# EAGLE board Transistor_Valve_Breakout_Circuit_Manual (EAGLE 9.3.0)
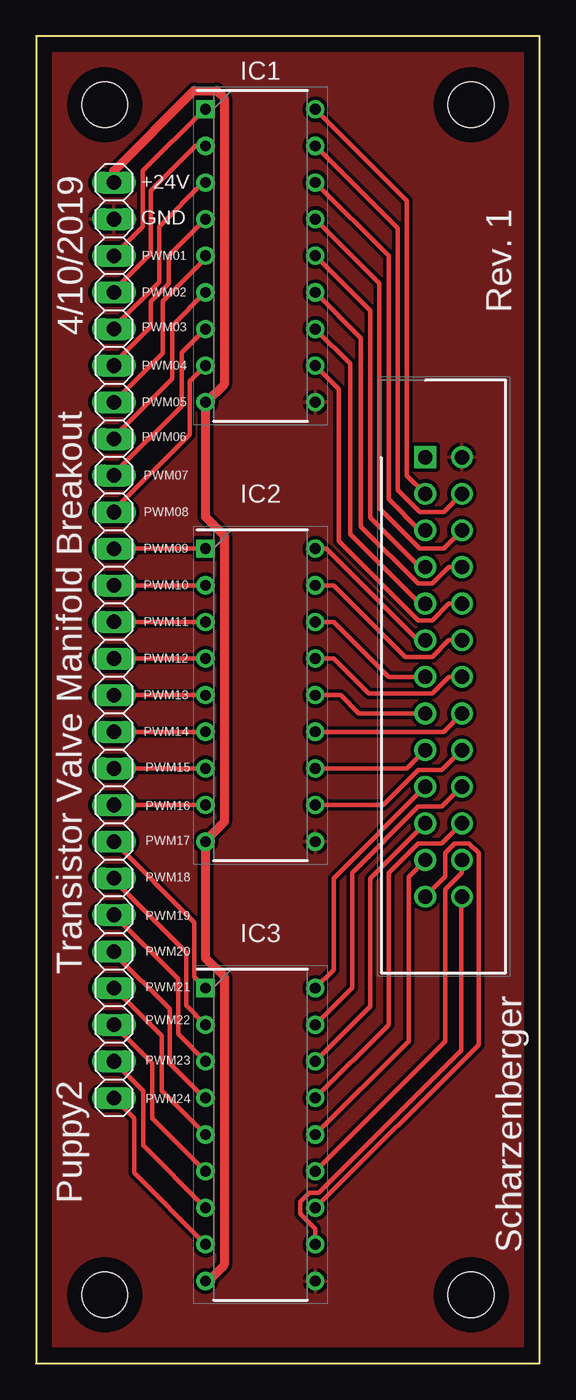
[diagram p0: board, top side]
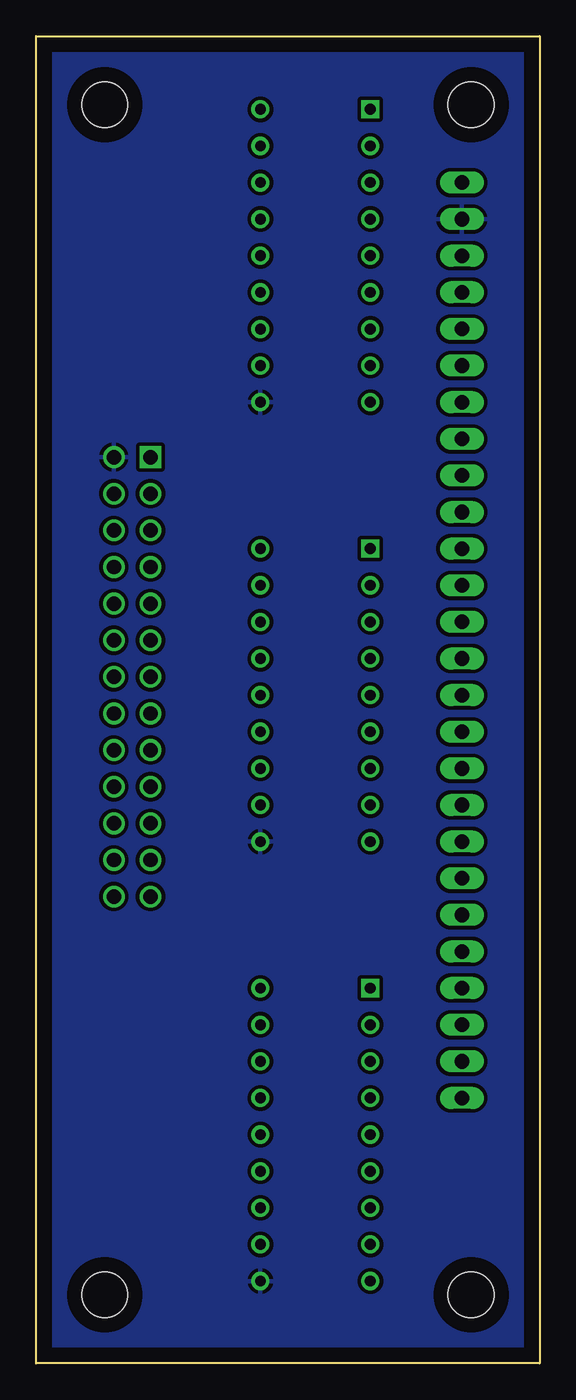
[diagram p1: board, bottom side, seen from below]

Size 34.92 x 92.08 mm. Coordinates in mm from the lower left corner, seen from the top.
Outline: 0,0 34.92,0 34.92,92.08 0,92.08 0,0
Copper layers (1*16): Top 0.035mm / dielectric 1.5mm / Bottom 0.035mm
Design rules "default": minimum track width 6mil, minimum drill 0.35mm, track to track 6mil, track to pad 6mil, pad to pad 6mil, via to via 6mil, smd to smd 6mil, copper to edge 40mil, drill to drill 6mil, minimum pad ring 10mil, minimum via ring 8mil, stop-mask expansion 4mil, vias tented up to drill 0mil, thermal gap 10mil
Net classes: 0 default: width 0.305 mm, drill 0.508 mm, clearance 0.254 mm
Holes 3.17 mm at 4.76,87.31 30.16,87.31 4.76,4.76 30.16,4.76

## Footprints (pad centres in the part's own frame; a part is rotated, then mirrored left to right if it is on the bottom)
DIP762W55P254L2286H480Q18N = drill 0.75 pad 1.15 square: 1 -3.81,10.16 | drill 0.75 pad 1.15: 2 -3.81,7.62; 3 -3.81,5.08; 4 -3.81,2.54; 5 -3.81,0; 6 -3.81,-2.54; 7 -3.81,-5.08; 8 -3.81,-7.62; 9 -3.81,-10.16; 10 3.81,-10.16; 11 3.81,-7.62; 12 3.81,-5.08; 13 3.81,-2.54; 14 3.81,0; 15 3.81,2.54; 16 3.81,5.08; 17 3.81,7.62; 18 3.81,10.16
SHDR26W81P254_2X13_4060X840X94 = drill 1 pad 1.5 square: 1 0,0 | drill 1 pad 1.5: 2 0,2.54; 3 2.54,0; 4 2.54,2.54; 5 5.08,0; 6 5.08,2.54; 7 7.62,0; 8 7.62,2.54; 9 10.16,0; 10 10.16,2.54; 11 12.7,0; 12 12.7,2.54; 13 15.24,0; 14 15.24,2.54; 15 17.78,0; 16 17.78,2.54; 17 20.32,0; 18 20.32,2.54; 19 22.86,0; 20 22.86,2.54; 21 25.4,0; 22 25.4,2.54; 23 27.94,0; 24 27.94,2.54; 25 30.48,0; 26 30.48,2.54
1X24 = drill 1.016 long: 1 -29.21,0; 2 -26.67,0; 3 -24.13,0; 4 -21.59,0; 5 -19.05,0; 6 -16.51,0; 7 -13.97,0; 8 -11.43,0; 9 -8.89,0; 10 -6.35,0; 11 -3.81,0; 12 -1.27,0; 13 1.27,0; 14 3.81,0; 15 6.35,0; 16 8.89,0; 17 11.43,0; 18 13.97,0; 19 16.51,0; 20 19.05,0; 21 21.59,0; 22 24.13,0; 23 26.67,0; 24 29.21,0
1X02 = drill 1.016 long: 1 -1.27,0; 2 1.27,0

## Placement (x,y rotation side)
IC1  TBD62783APG  [DIP762W55P254L2286H480Q18N]  15.56,76.83 0 top
IC2  TBD62783APG  [DIP762W55P254L2286H480Q18N]  15.56,46.35 0 top
IC3  TBD62783APG  [DIP762W55P254L2286H480Q18N]  15.56,15.88 0 top
J1  30326-6002HB  [SHDR26W81P254_2X13_4060X840X94]  26.99,62.87 270 top
JP1  [1X24]  5.4,47.62 270 top
JP2  [1X02]  5.4,80.64 270 top

## Library data of the parts
IC1-IC3 = SamacSys_Parts; DESCRIPTION: Gate Drivers DMOS Transistor Array 7-CH, 50V/0.5A; HEIGHT: 4.8mm; MANUFACTURER_NAME: Toshiba; MANUFACTURER_PART_NUMBER: TBD62783APG; MOUSER_PART_NUMBER: 757-TBD62783APG
J1 = SamacSys_Parts; DESCRIPTION: 3M 303 Series, Series Number 30326, 2.54mm Pitch 26 Way 2 Row Straight Header, Solder Termination, 1A; HEIGHT: 9.4mm; MANUFACTURER_NAME: 3M; MANUFACTURER_PART_NUMBER: 30326-6002HB; MOUSER_PART_NUMBER: 517-30326-6002
JP1 JP2 = pinhead

## Nets
+24V: IC1.9 IC2.9 IC3.9 JP2.1
GND: IC1.10 IC2.10 IC3.10 J1.2 JP2.2
PWM01: IC1.1 JP1.1
PWM02: IC1.2 JP1.2
PWM03: IC1.3 JP1.3
PWM04: IC1.4 JP1.4
PWM05: IC1.5 JP1.5
PWM06: IC1.6 JP1.6
PWM07: IC1.7 JP1.7
PWM08: IC1.8 JP1.8
PWM09: IC2.1 JP1.9
PWM10: IC2.2 JP1.10
PWM11: IC2.3 JP1.11
PWM12: IC2.4 JP1.12
PWM13: IC2.5 JP1.13
PWM14: IC2.6 JP1.14
PWM15: IC2.7 JP1.15
PWM16: IC2.8 JP1.16
PWM17: IC3.1 JP1.17
PWM18: IC3.2 JP1.18
PWM19: IC3.3 JP1.19
PWM20: IC3.4 JP1.20
PWM21: IC3.5 JP1.21
PWM22: IC3.6 JP1.22
PWM23: IC3.7 JP1.23
PWM24: IC3.8 JP1.24
VALVE01: IC1.18 J1.3
VALVE02: IC1.17 J1.4
VALVE03: IC1.16 J1.5
VALVE04: IC1.15 J1.6
VALVE05: IC1.14 J1.7
VALVE06: IC1.13 J1.8
VALVE07: IC1.12 J1.9
VALVE08: IC1.11 J1.10
VALVE09: IC2.18 J1.11
VALVE10: IC2.17 J1.12
VALVE11: IC2.16 J1.13
VALVE12: IC2.15 J1.14
VALVE13: IC2.14 J1.15
VALVE14: IC2.13 J1.16
VALVE15: IC2.12 J1.17
VALVE16: IC2.11 J1.18
VALVE17: IC3.18 J1.19
VALVE18: IC3.17 J1.20
VALVE19: IC3.16 J1.21
VALVE20: IC3.15 J1.22
VALVE21: IC3.14 J1.23
VALVE22: IC3.13 J1.24
VALVE23: IC3.12 J1.25
VALVE24: IC3.11 J1.26

## Tracks (layer width: path | path; a pad name or v marks a point on that pad's centre or on a via)
+24V
  Top 0.305: JP2.1 5.38,81.93
  Top 0.61: 5.38,81.93 5.38,82.71 10.95,88.28 12.54,88.28 13.04,87.79 13.04,67.9 11.81,66.67 IC1.9 11.75,58.73 13.04,57.44 13.04,37.54 11.75,36.26 IC2.9 11.75,28.12 13.04,26.83 13.04,6.81 11.94,5.71 IC3.9
GND
  pour Top: -1.27,93.66 -1.27,-1.27 36.51,-1.27 36.51,93.66
  pour Bottom: -1.27,93.66 -1.27,-1.27 36.51,-1.27 36.51,93.66
PWM01
  Top 0.305: JP1.1 7.41,78.85 7.41,82.72 11.68,87 IC1.1
PWM02
  Top 0.305: IC1.2 11.07,84.45 7.97,81.35 7.97,76.99 5.4,74.42 JP1.2
PWM03
  Top 0.305: IC1.3 11.58,81.92 8.53,78.87 8.53,75.01 5.4,71.88 JP1.3
PWM04
  Top 0.305: IC1.4 9.21,76.83 9.21,74.9 7.96,73.66 7.96,71.91 5.4,69.34 JP1.4
PWM05
  Top 0.305: IC1.5 11.75,76.65 8.79,73.69 8.79,70.07 JP1.5
PWM06
  Top 0.305: IC1.6 9.44,71.98 9.44,68.3 5.4,64.26 JP1.6
PWM07
  Top 0.305: IC1.7 10.1,70.1 10.1,66.42 5.4,61.72 JP1.7
PWM08
  Top 0.305: IC1.8 10.65,68.12 10.65,64.44 5.4,59.18 JP1.8
PWM09
  Top 0.305: JP1.9 IC2.1
PWM10
  Top 0.305: JP1.10 IC2.2
PWM11
  Top 0.305: JP1.11 IC2.3
PWM12
  Top 0.305: JP1.12 IC2.4
PWM13
  Top 0.305: JP1.13 IC2.5
PWM14
  Top 0.305: JP1.14 IC2.6
PWM15
  Top 0.305: JP1.15 IC2.7
PWM16
  Top 0.305: JP1.16 IC2.8
PWM17
  Top 0.305: JP1.17 10.99,30.61 10.99,26.8 IC3.1
PWM18
  Top 0.305: IC3.2 10.4,24.84 10.4,28.53 5.4,33.53 JP1.18
PWM19
  Top 0.305: JP1.19 9.84,26.67 9.84,22.86 IC3.3
PWM20
  Top 0.305: JP1.20 5.4,28.45 9.26,24.59 9.26,20.83 11.67,18.41 IC3.4
PWM21
  Top 0.305: IC3.5 8.7,18.92 8.7,22.73 JP1.21
PWM22
  Top 0.305: JP1.22 8.06,20.83 8.06,17.02 IC3.6
PWM23
  Top 0.305: JP1.23 7.43,18.92 7.43,15.11 IC3.7
PWM24
  Top 0.305: JP1.24 6.79,17.02 6.79,13.21 IC3.8
VALVE01
  Top 0.305: J1.3 25.72,61.59 25.72,80.64 IC1.18
VALVE02
  Top 0.305: J1.4 28.26,59.05 26.61,59.05 25.08,60.58 25.08,78.74 IC1.17
VALVE03
  Top 0.305: J1.5 26.61,57.78 24.45,59.94 24.45,76.83 IC1.16
VALVE04
  Top 0.305: IC1.15 23.81,74.93 23.81,59.32 26.62,56.52 28.26,56.52 J1.6
VALVE05
  Top 0.305: J1.7 26.61,55.24 23.18,58.67 23.18,73.03 IC1.14
VALVE06
  Top 0.305: IC1.13 22.52,71.14 22.52,58.07 26.51,54.09 27.47,54.09 28.63,55.24 J1.8
VALVE07
  Top 0.305: IC1.12 21.78,69.34 21.78,57.54 26.62,52.7 J1.9
VALVE08
  Top 0.305: IC1.11 21,67.58 21,57.05 26.51,51.55 27.47,51.55 28.63,52.7 J1.10
VALVE09
  Top 0.305: J1.11 26.48,50.16 20.13,56.52 IC2.18
VALVE10
  Top 0.305: J1.12 28.63,50.16 27.47,49.01 25.61,49.01 20.64,53.98 IC2.17
VALVE11
  Top 0.305: IC2.16 20.64,51.44 24.45,47.62 J1.13
VALVE12
  Top 0.305: J1.14 28.63,47.62 27.47,46.47 23.07,46.47 20.64,48.9 IC2.15
VALVE13
  Top 0.305: IC2.14 21.12,46.35 22.39,45.09 J1.15
VALVE14
  Top 0.305: IC2.13 28.26,43.81 J1.16
VALVE15
  Top 0.305: IC2.12 25.72,41.27 J1.17
VALVE16
  Top 0.305: IC2.11 24.08,38.73 26.51,41.16 28.15,41.16 J1.18
VALVE17
  Top 0.305: IC3.18 20.64,27.3 20.64,33.66 J1.19
VALVE18
  Top 0.305: IC3.17 21.91,26.04 21.91,34.03 26.51,38.62 28.15,38.62 J1.20
VALVE19
  Top 0.305: IC3.16 23.18,24.77 23.18,33.66 J1.21
VALVE20
  Top 0.305: IC3.15 24.45,23.5 24.45,34.03 26.51,36.09 28.15,36.09 J1.22
VALVE21
  Top 0.305: IC3.14 25.83,22.34 25.83,33.76 J1.23
VALVE22
  Top 0.305: IC3.13 28.37,22.34 28.37,32.87 29.53,34.03 J1.24
VALVE23
  Top 0.305: J1.25 28.37,33.77 28.37,35.41 29.05,36.09 30.01,36.09 30.69,35.41 30.69,22.11 IC3.12
VALVE24
  Top 0.305: IC3.11 19.37,9.33 18.33,10.37 18.33,11.22 18.94,11.83 19.61,11.83 29.49,21.71 29.49,32.35 J1.26

## Text on the board
tPlace: +24V | GND | PWM01 | PWM02 | Rev. 1 | PWM03 | 4/10/2019 | PWM04 | PWM05 | PWM06 | PWM07 | PWM08 | PWM09 | PWM10 | PWM11 | PWM12 | PWM13 | PWM14 | PWM15 | PWM16 | PWM17 | PWM18 | PWM19 | PWM20 | Transistor Valve Manifold Breakout | PWM21 | PWM22 | PWM23 | PWM24 | Puppy2 | Scharzenberger